# Altium PCB master.PcbDoc
Units mm, origin at the board's own origin, x right, y up, seen from the top; angles counter-clockwise.
Board outline 55 x 110 mm, 2 copper layers (Top Layer, Bottom Layer); 25 components, 39 nets, 291 pads, 34 vias.
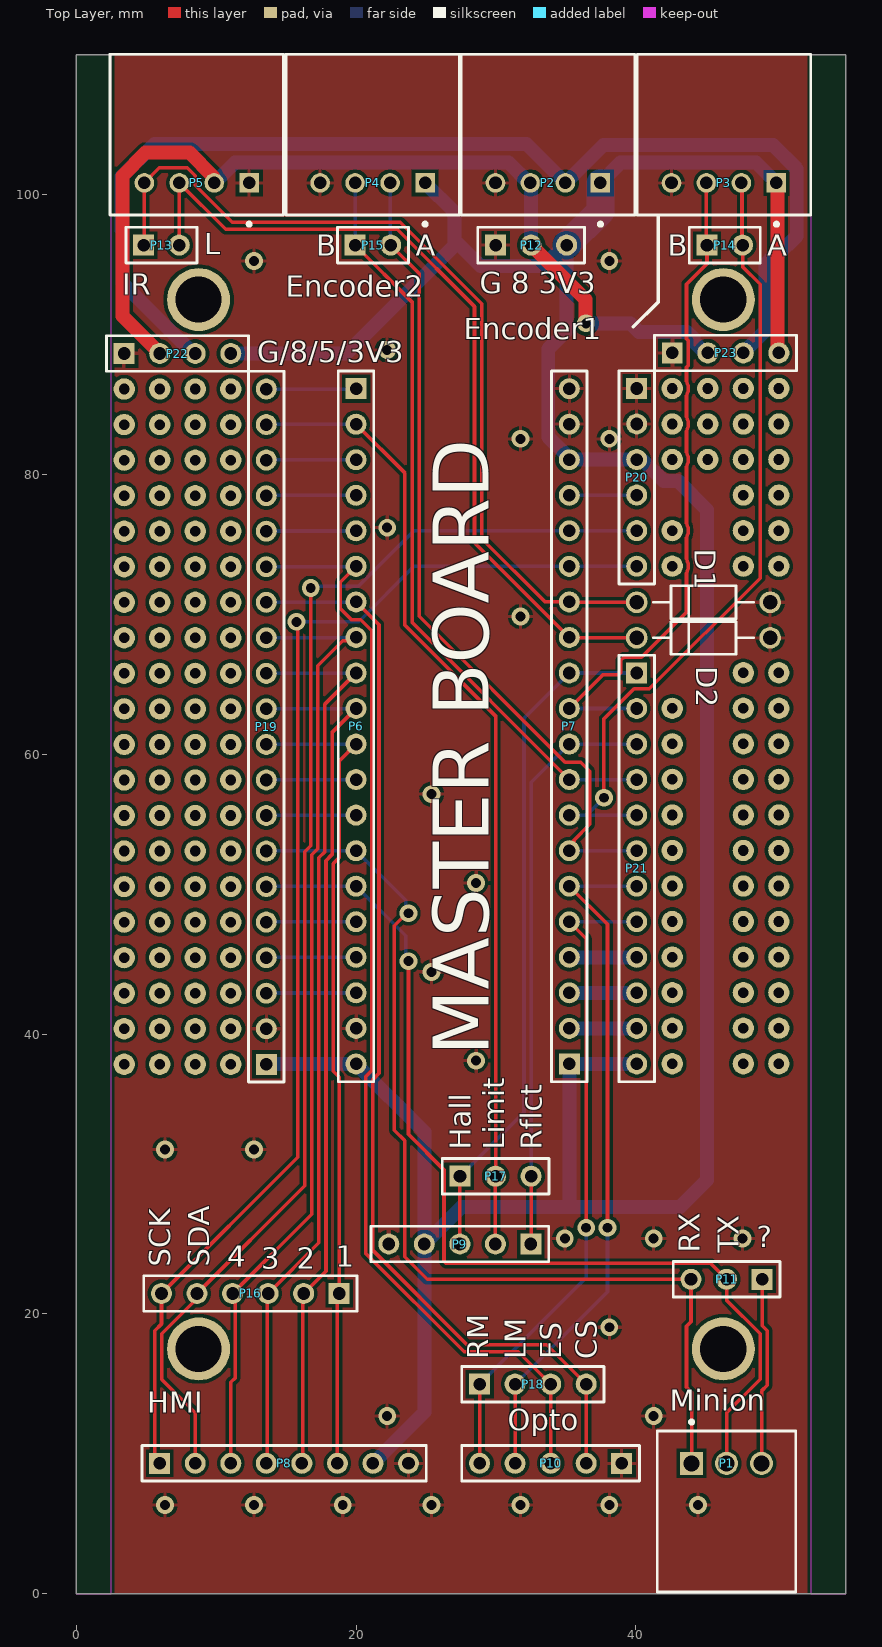
[diagram p0: Top Layer view]
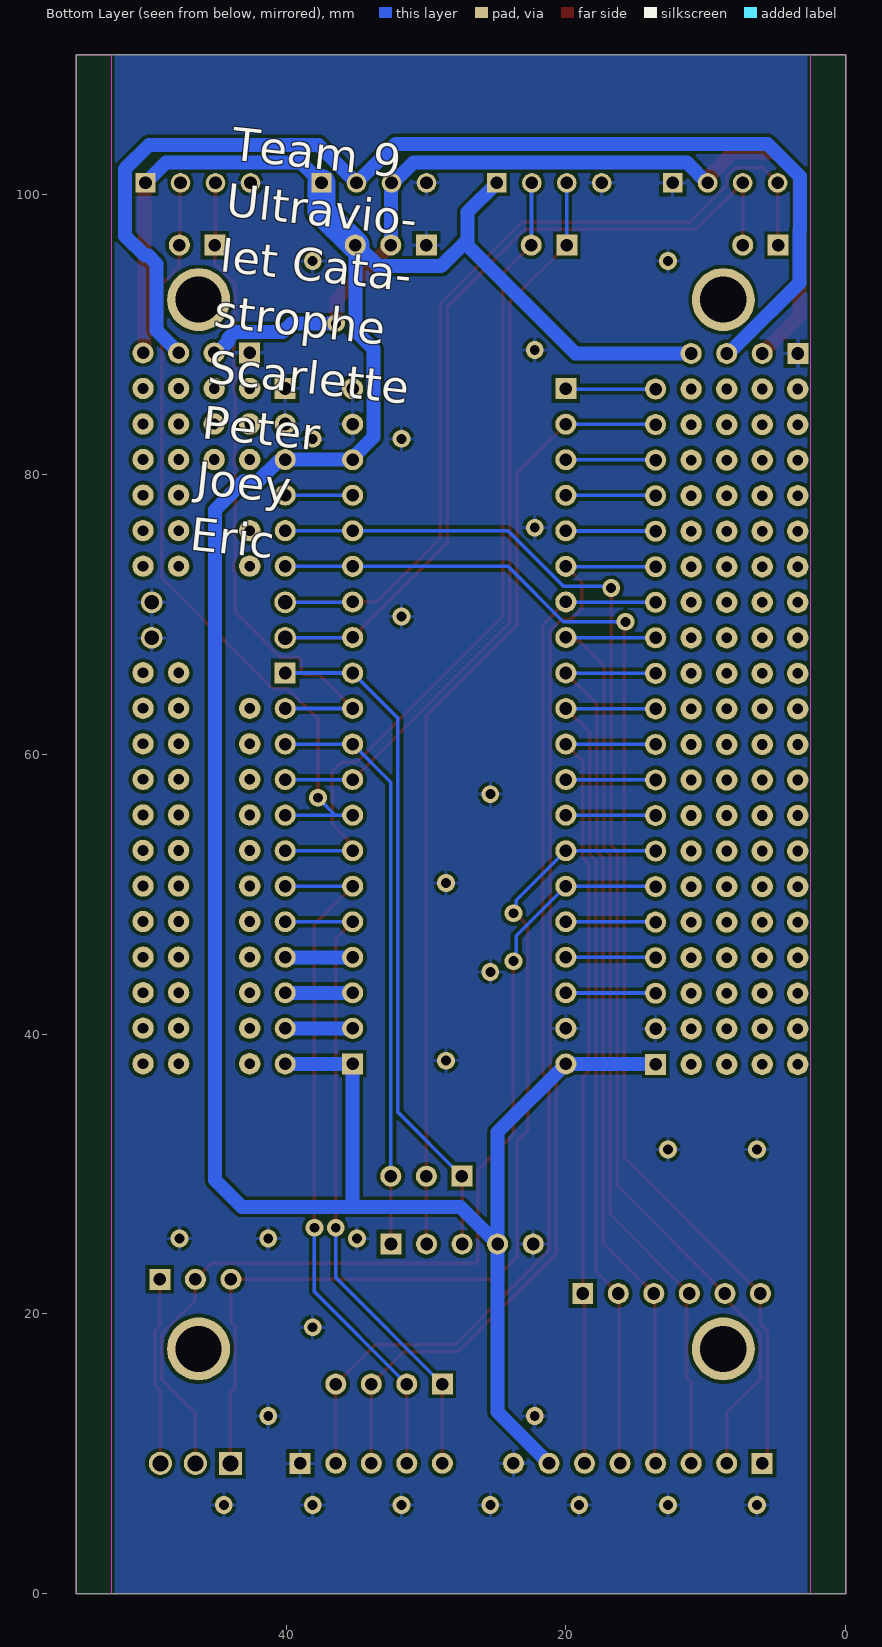
[diagram p1: Bottom Layer view, seen from below]

## Layer stack, top to bottom
Top Solder: solder mask 0.0102, Solder Resist, Dk 3.5
Top Layer: signal copper 0.0356
Dielectric 1: dielectric 0.32, FR-4, Dk 4.8
Bottom Layer: signal copper 0.0356
Bottom Solder: solder mask 0.0102, Solder Resist, Dk 3.5

## Board outline
0,0 0,110 55,110 55,0

## Design rules (kind name [scope] priority, off if disabled: settings)
Clearance [All] p1: gap=0.254 ignorepadtopadclearanceinfootprint=FALSE except(0: Arc-Hole Track-Hole SMDPad-Hole THPad-Hole Via-Hole Fill-Hole Poly-Hole Region-Hole Text-Hole)
PolygonConnect [All] p1: connectstyle=Relief reliefconductorwidth=0.254 reliefentries=4 polygonreliefangle="90 Angle" airgapwidth=0.254
RoutingVias [All] p1: holewidth=0.711 width=1.27 viastyle="Through Hole" minholewidth=0.711 minwidth=1.27 maxholewidth=0.711 maxwidth=1.27
SolderMaskExpansion [All] p1: expansion=0.102 istentingtop=FALSE
Width [All] p1: maxlimit=1 minlimit=0.254 preferedwidth=0.254 minimp=50.000000 maximp=50.000000 favimp=50.000000
30 further rules are at their usual default settings.

## Components (designator, comment, footprint, x,y, rotation, side; value= is the part's Value field where it differs from the comment)
D1 "1N5913BRLG" ONSC-AXIAL_LEAD-2-59-10_P 44.831,70.866 r0 top
D2 "1N5913BRLG" ONSC-AXIAL_LEAD-2-59-10_P 44.831,68.326 r0 top
P1 "S3B-XH-A(LF)(SN)" JST-S3B-XH-A(LF)(SN)_V 46.482,9.325 r0 top
P2 "S4B-XH-A(LF)(SN)" JST-S4B-XH-A(LF)(SN)_V 33.715,100.838 r180 top
P3 "S4B-XH-A(LF)(SN)" JST-S4B-XH-A(LF)(SN)_V 46.295,100.838 r180 top
P4 "S4B-XH-A(LF)(SN)" JST-S4B-XH-A(LF)(SN)_V 21.189,100.838 r180 top
P5 "S4B-XH-A(LF)(SN)" JST-S4B-XH-A(LF)(SN)_V 8.616,100.838 r180 top
P6 "Header 20" HDR1X20 20.002,86.133 r270 top
P7 "Header 20" HDR1X20 35.242,37.873 r90 top
P8 "Header 8" HDR1X8 5.969,9.325 r0 top
P9 "Header 5" HDR1X5 32.5,25 r180 top
P10 "Header 5" HDR1X5 38.989,9.325 r180 top
P11 "Header 3" HDR1X3 49.022,22.479 r180 top
P12 "Header 3" HDR1X3 29.972,96.393 r0 top
P13 "Header 2" HDR1X2 4.826,96.393 r0 top
P14 "Header 2" HDR1X2 45.085,96.393 r0 top
P15 "Header 2" HDR1X2 19.939,96.393 r0 top
P16 "Header 6" HDR1X6 18.796,21.463 r180 top
P17 "Header 3" HDR1X3 27.432,29.845 r0 top
P18 "Header 4" HDR1X4 28.829,14.986 r0 top
P19 "Header 20" HDR1X20 13.589,37.846 r90 top
P20 "Header 6" HDR1X6 40.061,86.147 r270 top
P21 "Header 12" HDR1X12 40.061,65.813 r270 top
P22 "Header 4" HDR1X4 3.429,88.646 r0 top
P23 "Header 4" HDR1X4 42.601,88.687 r0 top

## Footprints (in the part's own frame and the unit in brackets; to place one, negate y for a bottom-side part, rotate by r counter-clockwise, add the part's x,y. Pads: shape width x height; smd on the part's side, far side on the other; paste and mask are expansions set on the pad)
HDR1X2 [mm] "Connector; Header; 2 Position"
  rect 1.5x1.5 hole 0.9: 1(0,0)
  round 1.5 hole 0.9: 2(2.54,0)
  silkscreen extent -1.27,-1.27 3.81,1.27
HDR1X3 [mm] "Connector; Header; 3 Position"
  rect 1.5x1.5 hole 0.9: 1(0,0)
  round 1.5 hole 0.9: 2(2.54,0) 3(5.08,0)
  silkscreen extent -1.27,-1.27 6.35,1.27
HDR1X4 [mm] "Connector; Header; 4 Position"
  rect 1.5x1.5 hole 0.9: 1(0,0)
  round 1.5 hole 0.9: 2(2.54,0) 3(5.08,0) 4(7.62,0)
  silkscreen extent -1.27,-1.27 8.89,1.27
HDR1X5 [mm] "Connector; Header; 5 Position"
  rect 1.5x1.5 hole 0.9: 1(0,0)
  round 1.5 hole 0.9: 2(2.54,0) 3(5.08,0) 4(7.62,0) 5(10.16,0)
  silkscreen extent -1.27,-1.27 11.43,1.27
HDR1X6 [mm] "Connector; Header; 6 Position"
  rect 1.5x1.5 hole 0.9: 1(0,0)
  round 1.5 hole 0.9: 2(2.54,0) 3(5.08,0) 4(7.62,0) 5(10.16,0) 6(12.7,0)
  silkscreen extent -1.27,-1.27 13.97,1.27
HDR1X8 [mm] "Connector; Header; 8 Position"
  rect 1.5x1.5 hole 0.9: 1(0,0)
  round 1.5 hole 0.9: 2(2.54,0) 3(5.08,0) 4(7.62,0) 5(10.16,0) 6(12.7,0) 7(15.24,0) 8(17.78,0)
  silkscreen extent -1.27,-1.27 19.05,1.27
HDR1X12 [mm] "Connector; Header; 12 Position"
  rect 1.5x1.5 hole 0.9: 1(0,0)
  round 1.5 hole 0.9: 2(2.54,0) 3(5.08,0) 4(7.62,0) 5(10.16,0) 6(12.7,0) 7(15.24,0) 8(17.78,0) 9(20.32,0) 10(22.86,0) 11(25.4,0) 12(27.94,0)
  silkscreen extent -1.27,-1.27 29.21,1.27
HDR1X20 [mm] "Connector; Header; 20 Position"
  rect 1.5x1.5 hole 0.9: 1(0,0)
  round 1.5 hole 0.9: 2(2.54,0) 3(5.08,0) 4(7.62,0) 5(10.16,0) 6(12.7,0) 7(15.24,0) 8(17.78,0) 9(20.32,0) 10(22.86,0) 11(25.4,0) 12(27.94,0) 13(30.48,0) 14(33.02,0) 15(35.56,0) 16(38.1,0) 17(40.64,0) 18(43.18,0) 19(45.72,0) 20(48.26,0)
  silkscreen extent -1.27,-1.27 49.53,1.27
JST-S3B-XH-A(LF)(SN)_V [mm] "Header, 3-Leads, Body 9.9x11.5mm, Pitch 2.5mm"
  rect 1.65x1.65 hole 1.15: 1(-2.5,0)
  round 1.65 hole 1.15: 2(0,0) 3(2.5,0)
  silkscreen extent -4.95,-9.2 4.95,3.08, body extent -4.95,-9.2 4.95,2.3, height 6.15
JST-S4B-XH-A(LF)(SN)_V [mm] "Header, 4-Leads, Body 12.4x11.5mm, Pitch 2.5mm"
  rect 1.4x1.4 hole 0.9: 1(-3.75,0)
  round 1.4 hole 0.9: 2(-1.25,0) 3(1.25,0) 4(3.75,0)
  silkscreen extent -6.2,-9.2 6.2,3.08, body extent -6.2,-9.2 6.2,2.3, height 6.15
ONSC-AXIAL_LEAD-2-59-10_P [mm] "AXIAL, 2-Leads, Diameter 2.35mm"
  round 1.55 hole 1.05: 1(-4.77,0) 2(4.77,0)
  silkscreen extent -3.59,-1.17 3.59,1.17

## Part data
D1 D2: library part CMP-1060-00006-1, "3 W Zener Voltage Regulator, 2-Pin Axial_Lead, Pb-Free, Tape and Reel", Manufacturer="On Semiconductor", ComponentLink1Description="Manufacturer URL", ComponentLink1URL=http://www.onsemi.com/, ComponentLink2Description=Datasheet, ComponentLink2URL=http://www.onsemi.cn/pub_link/Collateral/1N5913B-D.PDF, ComponentLink3Description="Package Specification", ComponentLink3URL=http://www.onsemi.cn/pub_link/Collateral/59-10.PDF, DatasheetVersion="Rev. 5", Mounting Technology="Through Hole", PackageDescription="2-Pin, Axial Lead, Diameter 2.35 mm", PackageReference=AXIAL_LEAD-2-59-10, PackageVersion="Rev. U, 02/2005", Packing="Tape and Reel", PartNumber=1N5913BRLG, RoHS=Pb-Free, VZ Typ (V)=3.3
P1: library part CMP-1755-00006-1, "Male Header, Pitch 2.5 mm, 1 x 3 Position, Height 6.1 mm, Tail Length 3.4 mm, -25 to 85 degC, RoHS, Bulk", Case\Package=DIP, Frequency="1.8 MHz", Max Operating Temperature="70 degC", Max Ouput Current="-10 mA", Max Power Dissipation="1 W", Max Supply Voltage="15 V", Min Operating Temperature="0 degC", Min Supply Voltage="1 V", Nominal Supply Current="170 uA", Package Quantity=50, Channels=1, ComponentLink1Description="Manufacturer URL", ComponentLink1URL=http://www.jst.com/home2.html, ComponentLink2Description=Datasheet, ComponentLink2URL=http://www.jst-mfg.com/product/pdf/eng/eXH.pdf, DatasheetVersion=May-16, Height="4.57 mm", Length="9.81 mm", Mount="Through Hole", PackageDescription="Male Header, Pitch 2.5 mm, 1 x 3 Position, Height 6.1 mm, Tail Length 3.4 mm", PackageReference=S3B-XH-A(LF)(SN), Packaging=Rail/Tube, Pins=8, Radiation Hardening=No, REACH SVHC="No SVHC", RoHSCompliant=true, Weight="0.015535 oz", Width="6.35 mm"
P2 P3 P4 P5: library part CMP-1755-00007-1, "Male Header, Pitch 2.5 mm, 1 x 4 Position, Height 6.1 mm, Tail Length 3.4 mm, -25 to 85 degC, RoHS, Bulk", ComponentLink1Description="Manufacturer URL", ComponentLink1URL=http://www.jst.com/home2.html, ComponentLink2Description=Datasheet, ComponentLink2URL=http://www.jst-mfg.com/product/pdf/eng/eXH.pdf, DatasheetVersion=May-16, PackageDescription="Male Header, Pitch 2.5 mm, 1 x 4 Position, Height 6.1 mm, Tail Length 3.4 mm", PackageReference=S4B-XH-A(LF)(SN)
P6 P7 P19: "Header, 20-Pin", LatestRevisionDate=17-Jul-2002, LatestRevisionNote="Re-released for DXP Platform.", Publisher="Altium Limited"
P8: "Header, 8-Pin", LatestRevisionDate=17-Jul-2002, LatestRevisionNote="Re-released for DXP Platform.", Publisher="Altium Limited"
P9 P10: "Header, 5-Pin", LatestRevisionDate=17-Jul-2002, LatestRevisionNote="Re-released for DXP Platform.", Publisher="Altium Limited"
P11 P12 P17: "Header, 3-Pin", LatestRevisionDate=17-Jul-2002, LatestRevisionNote="Re-released for DXP Platform.", Publisher="Altium Limited"
P13 P14 P15: "Header, 2-Pin", LatestRevisionDate=17-Jul-2002, LatestRevisionNote="Re-released for DXP Platform.", Publisher="Altium Limited"
P16 P20: "Header, 6-Pin", LatestRevisionDate=17-Jul-2002, LatestRevisionNote="Re-released for DXP Platform.", Publisher="Altium Limited"
P18 P22 P23: "Header, 4-Pin", LatestRevisionDate=17-Jul-2002, LatestRevisionNote="Re-released for DXP Platform.", Publisher="Altium Limited"
P21: "Header, 12-Pin", LatestRevisionDate=17-Jul-2002, LatestRevisionNote="Re-released for DXP Platform.", Publisher="Altium Limited"

## Free pads (board coordinates)
  round 4.5 hole 3.3: 12(8.75,17.5) 12(8.75,92.5) 13(46.25,17.5) 13(46.25,92.5)
  round 1.524 hole 0.762: 14(5.969,42.926) 14(5.969,50.546) 14(5.969,58.166) 14(5.969,65.786) 14(5.969,73.406) 14(5.969,81.026) 14(5.969,86.106) 14(8.509,42.926) 14(8.509,50.546) 14(8.509,58.166) 14(8.509,65.786) 14(8.509,73.406) 14(8.509,81.026) 14(8.509,86.106) 14(45.141,81.067) 14(45.141,86.147) 14(47.681,42.967) 14(47.681,50.587) 14(47.681,58.207) 14(47.681,65.827) 14(47.681,73.447) 14(47.681,81.067) 14(47.681,86.147) 15(5.969,40.386) 15(5.969,48.006) 15(5.969,55.626) 15(5.969,63.246) 15(5.969,70.866) 15(5.969,78.486) 15(5.969,83.566) 15(8.509,40.386) 15(8.509,48.006) 15(8.509,55.626) 15(8.509,63.246) 15(8.509,70.866) 15(8.509,78.486) 15(8.509,83.566) 15(45.141,83.607) 15(47.681,40.427) 15(47.681,48.047) 15(47.681,55.667) 15(47.681,63.287) 15(47.681,78.527) 15(47.681,83.607) 16(11.049,40.386) 16(11.049,48.006) 16(11.049,55.626) 16(11.049,63.246) 16(11.049,70.866) 16(11.049,78.486) 16(11.049,83.566) 16(50.221,40.427) 16(50.221,48.047) 16(50.221,55.667) 16(50.221,63.287) 16(50.221,78.527) 16(50.221,83.607) 17(11.049,42.926) 17(11.049,50.546) 17(11.049,58.166) 17(11.049,65.786) 17(11.049,73.406) 17(11.049,81.026) 17(11.049,86.106) 17(50.221,42.967) 17(50.221,50.587) 17(50.221,58.207) 17(50.221,65.827) 17(50.221,73.447) 17(50.221,81.067) 17(50.221,86.147) 18(3.429,42.926) 18(3.429,50.546) 18(3.429,58.166) 18(3.429,65.786) 18(3.429,73.406) 18(3.429,81.026) 18(3.429,86.106) 18(42.601,42.967) 18(42.601,50.587) 18(42.601,58.207) 18(42.601,73.447) 18(42.601,81.067) 18(42.601,86.147) 19(3.429,40.386) 19(3.429,48.006) 19(3.429,55.626) 19(3.429,63.246) 19(3.429,70.866) 19(3.429,78.486) 19(3.429,83.566) 19(42.601,40.427) 19(42.601,48.047) 19(42.601,55.667) 19(42.601,83.607) 20(3.429,37.846) 20(3.429,45.466) 20(3.429,53.086) 20(3.429,60.706) 20(3.429,68.326) 20(3.429,75.946) 20(42.601,37.887) 20(42.601,45.507) 20(42.601,53.127) 20(42.601,60.747) 20(42.601,63.285) 20(42.601,75.987) 21(11.049,37.846) 21(11.049,45.466) 21(11.049,53.086) 21(11.049,60.706) 21(11.049,68.326) 21(11.049,75.946) 21(50.221,37.887) 21(50.221,45.507) 21(50.221,53.127) 21(50.221,60.747) 21(50.221,75.987) 22(5.969,37.846) 22(5.969,45.466) 22(5.969,53.086) 22(5.969,60.706) 22(5.969,68.326) 22(5.969,75.946) 22(8.509,37.846) 22(8.509,45.466) 22(8.509,53.086) 22(8.509,60.706) 22(8.509,68.326) 22(8.509,75.946) 22(47.681,37.887) 22(47.681,45.507) 22(47.681,53.127) 22(47.681,60.747) 22(47.681,75.987)

## Via types
v1: diameter 1.27, hole 0.711, Top Layer to Bottom Layer, tented both sides, 33 vias
v2: diameter 1.27, hole 0.711, Top Layer to Bottom Layer, 1 vias

## Nets (pads, with @x,y where several pads share a name; then routed paths per layer and width w, separated by ;. In a path a pad name is that pad's centre, name@x,y a point inside that pad or via, vN(x,y) a via of type N, cw(c..) or ccw(c..) an arc to the next point about the centre after c; other vN are vias at no path point)
3V3: P2.1 P3.1 P4.1 P6.20 P7.1 P7.18 P8.7 P9.4 P12.3 P19.1 P20.3 P21.12 P22.4 P23.4 | length 216.4
  Top Layer w1: P3.1 50.133,100.75 50.133,88.775 P23.4
  Bottom Layer w1: P22.4 19.304,88.646 27.024,96.366 27.024,96.774 ; P19.1 13.603,37.86 19.989,37.86 P6.20 24.88,32.996 P9.4 ; P8.7 24.88,12.996 P9.4 ; P4.1 27.024,98.753 27.024,96.774 ; P2.1 38.919,102.292 48.591,102.292 P3.1 ; P20.3@39.662,81.053 P7.18 35.242,81.188 33.738,82.692 33.738,88.957 35.052,90.271 P12.3 34.917,96.393 33.413,94.889 28.91,94.889 27.024,96.774 ; P21.12 P7.1 35.242,27.766 35.348,27.661 ; P20.3 40.157,80.971 40.553,80.971 41.973,79.551 43.004,79.551 45.085,77.47 45.085,29.591 43.155,27.661 35.348,27.661 ; P9.4 27.541,27.661 35.348,27.661
  Bottom Layer w2: P12.3 37.465,98.806 P2.1
5V: P2.2 P22.3 P23.3 | length 82
  Bottom Layer w1: P22.3 8.374,88.646 7.524,89.496 7.506,89.496 3.322,93.68 3.322,97.42 3.254,97.488 3.254,101.282 5.604,103.632 32.171,103.632 P2.2 37.673,103.546 49.803,103.546 51.499,101.85 51.499,97.048 50.087,95.636 49.84,95.636 49.254,95.05 49.254,90.296 47.681,88.723 P23.3
8V: P2.3 P5.2 P12.2 P22.2 P23.2 | length 67.4
  Top Layer w1: P22.2 5.969,88.672 3.302,91.339 3.302,101.33 4.969,102.997 8.104,102.997 9.789,101.311 9.789,100.915 P5.2 ; P12.2 36.389,92.516 36.389,90.857 v1(36.441,90.805)
  Bottom Layer w1: P5.2 9.9,100.838 11.354,102.292 30.903,102.292 32.38,100.814 32.488,100.814 32.488,96.417 P12.2 ; v1(36.441,90.805) 39.624,90.805 40.238,90.191 43.663,90.191 44.105,89.749 44.105,89.523 44.691,88.937 44.756,88.937 45.006,88.687 P23.2
"Claw Reflect": P7.10 P9.1 P17.3 P21.3 | length 41.7
  Top Layer w0.254: P9.1 32.512,25.012 P17.3
  Bottom Layer w0.254: P17.3 32.512,58.003 P7.10 P21.3
"Claw Servo Opto": P6.7 P10.2 P18.4 P19.14 | length 78.5
  Top Layer w0.254: P6.7 21.642,69.254 21.642,37.194 21.209,36.762 21.209,24.532 27.935,17.805 33.63,17.805 P18.4 P10.2
  Bottom Layer w0.254: P19.14 19.975,70.866 P6.7
Display_SCK: P7.15 P8.1 P16.6 P20.6 | length 90.5
  Top Layer w0.254: P8.1 5.611,9.683 5.611,18.8 6.096,19.285 P16.6 15.823,31.19 15.823,69.394 v1(15.748,69.469)
  Bottom Layer w0.254: v1(15.748,69.469) 15.763,69.484 20.193,69.484 24.142,73.433 P7.15 35.249,73.44 40.054,73.44 P20.6
Display_SDA: P7.16 P8.2 P16.5 P20.5 | length 93
  Top Layer w0.254: P8.2 8.509,12.931 6.119,15.321 6.119,18.59 8.398,20.868 8.398,21.225 P16.5 16.331,29.158 16.331,53.034 16.764,53.467 v1(16.764,71.882)
  Bottom Layer w0.254: v1(16.764,71.882) 16.906,72.024 20.193,72.024 24.142,75.973 P7.16 35.249,75.98 40.054,75.98 P20.5
"Elbow Servo Opto": P6.6 P10.3 P18.3 P19.15 | length 80.2
  Top Layer w0.254: P6.6 18.871,72.302 18.871,70.425 19.673,69.623 20.332,69.623 21.134,68.822 21.134,37.405 20.701,36.972 20.701,24.321 27.725,17.297 31.598,17.297 P18.3 P10.3
  Bottom Layer w0.254: P19.15 13.603,73.42 19.989,73.42 P6.6
Encoder1A: P3.2 P7.8 P14.2 P21.5 | length 56.3
  Top Layer w0.254: v2(37.719,56.896) 37.719,62.53 39.871,64.682 40.969,64.682 48.881,72.594 48.881,93.59 47.625,94.846 P14.2 47.585,96.433 47.585,100.798 P3.2
  Bottom Layer w0.254: P7.8 36.476,55.653 ; v2(37.719,56.896) 36.476,55.653 ; P21.5 36.476,55.653
Encoder1B: P3.3 P7.11 P14.1 P21.2 | length 48.2
  Top Layer w0.254: P7.11 37.649,65.679 38.781,65.679 38.856,65.754 38.93,65.828 38.93,66.721 39.153,66.944 40.401,66.944 43.619,70.162 43.619,72.927 ccw(c42.601,73.447) 43.619,73.967 43.619,75.467 ccw(c42.601,75.987) 43.619,76.507 43.619,80.547 ccw(c42.601,81.067) 43.619,81.587 43.619,83.029 43.619,83.087 ccw(c42.601,83.607) 43.619,84.127 43.619,84.185 43.619,85.627 ccw(c42.601,86.147) 43.619,86.667 43.619,87.666 43.732,87.779 43.732,89.595 43.619,89.708 43.619,93.59 45.085,95.056 P14.1 45.045,96.433 P3.3
  Bottom Layer w0.254: P7.11 P21.2
Encoder2A: P4.2 P7.7 P15.2 P21.6 | length 59.7
  Top Layer w0.254: P15.2 24.511,94.361 24.511,69.865 34.94,59.436 36.068,59.436 36.703,58.801 36.703,54.991 35.579,53.867 35.579,53.787 35.242,53.45 P7.7
  Bottom Layer w0.254: P4.2 22.459,100.818 22.459,96.413 P15.2 ; P7.7 P21.6
Encoder2B: P4.3 P7.9 P15.1 P21.4 | length 53.8
  Top Layer w0.254: P15.1 24.003,92.329 24.003,69.433 P7.9
  Bottom Layer w0.254: P15.1 P4.3 ; P7.9 P21.4
GND: D1.2 D2.2 P2.4 P3.4 P4.4 P5.1 P6.19 P7.19 P7.20 P8.8 P9.5 P10.1 P12.1 P19.2 P20.1 P20.2 P22.1 P23.1
  other v1: 6.35,6.35 12.7,6.35 19.05,6.35 25.4,6.35 31.75,6.35 38.1,6.35 44.45,6.35 22.225,12.7 41.275,12.7 38.1,19.05 34.925,25.4 41.275,25.4 47.625,25.4 6.35,31.75 12.7,31.75 28.575,38.1 25.4,44.45 28.575,50.8 25.4,57.15 31.75,69.85 22.225,76.2 31.75,82.55 38.1,82.55 22.225,88.9 12.7,95.25 38.1,95.25
"Hall Effect": P7.12 P9.3 P17.1 P21.1 | length 48.9
  Top Layer w0.254: P9.3 27.42,29.833 P17.1
  Bottom Layer w0.254: P17.1 32.004,34.417 32.004,62.575 P7.12 P21.1
HMI1: P6.8 P8.3 P16.4 P19.13 | length 69.7
  Top Layer w0.254: P8.3 11.049,15.109 11.381,15.441 11.381,21.258 P16.4 16.839,27.126 16.839,52.824 17.272,53.256 17.272,66.334 19.053,68.115 19.764,68.115 P6.8
  Bottom Layer w0.254: P19.13 13.603,68.34 19.989,68.34 P6.8
HMI2: P6.9 P8.4 P16.3 P19.12 | length 65.6
  Top Layer w0.254: P8.4 13.652,9.389 13.652,21.399 P16.3 17.347,25.094 17.347,52.613 17.78,53.046 17.78,63.591 P6.9
  Bottom Layer w0.254: P19.12 13.603,65.8 19.989,65.8 P6.9
HMI3: P6.10 P8.5 P16.2 P19.11 | length 62
  Top Layer w0.254: P8.5 16.192,9.389 16.192,21.399 P16.2 17.855,23.062 17.855,52.403 18.288,52.835 18.288,61.559 P6.10
  Bottom Layer w0.254: P19.11 13.603,63.26 19.989,63.26 P6.10
HMI4: P6.11 P8.6 P16.1 P19.10 | length 58.7
  Top Layer w0.254: P8.6 18.669,21.336 P16.1 18.796,36.923 18.363,37.356 18.363,52.193 18.796,52.625 18.796,59.527 P6.11
  Bottom Layer w0.254: P19.10 13.603,60.72 19.989,60.72 P6.11
"Left IR Strength": D2.1 P5.3 P7.13 P13.2 | length 65.3
  Top Layer w0.254: P13.2 P5.3 10.68,97.524 22.947,97.524 28.468,92.004 28.468,75.128 P7.13 35.256,68.34 40.047,68.34 D2.1
  Bottom Layer w0.254: P7.13 35.256,68.34 40.047,68.34 D2.1
"Left Motor Opto": P7.6 P10.4 P18.2 P21.7 | length 49.9
  Top Layer w0.254: P10.4 P18.2 ; P7.6 37.973,47.843 v1(37.973,26.162)
  Bottom Layer w0.254: P18.2 37.973,21.59 v1(37.973,26.162) ; P7.6 P21.7
"Limit Switch": P6.2 P9.2 P17.2 P19.19 | length 69.2
  Top Layer w0.254: P6.2 23.495,80.101 23.495,69.215 29.972,62.738 P17.2 29.966,29.839 29.966,25.006 P9.2
  Bottom Layer w0.254: P19.19 13.603,83.58 19.989,83.58 P6.2
NetP1_3: P1.3 P11.1 | length 13.5
  Top Layer w0.254: P1.3 48.982,14.49 49.389,14.897 49.389,18.8 49.022,19.167 P11.1
NetP6_1: P6.1 P19.20 | length 6.4
  Bottom Layer w0.254: P19.20 19.975,86.106 P6.1
NetP6_3: P6.3 P19.18 | length 6.4
  Bottom Layer w0.254: P19.18 13.603,81.04 19.989,81.04 P6.3
NetP6_4: P6.4 P19.17 | length 6.4
  Bottom Layer w0.254: P19.17 13.603,78.5 19.989,78.5 P6.4
NetP6_5: P6.5 P19.16 | length 6.4
  Bottom Layer w0.254: P19.16 13.603,75.96 19.989,75.96 P6.5
NetP6_12: P6.12 P19.9 | length 6.4
  Bottom Layer w0.254: P19.9 13.603,58.18 19.989,58.18 P6.12
NetP6_13: P6.13 P19.8 | length 6.4
  Bottom Layer w0.254: P19.8 13.603,55.64 19.989,55.64 P6.13
NetP6_16: P6.16 P19.5 | length 6.4
  Bottom Layer w0.254: P19.5 13.603,48.02 19.989,48.02 P6.16
NetP6_17: P6.17 P19.4 | length 6.4
  Bottom Layer w0.254: P19.4 13.603,45.48 19.989,45.48 P6.17
NetP6_18: P6.18 P19.3 | length 6.4
  Bottom Layer w0.254: P19.3 13.603,42.94 19.989,42.94 P6.18
NetP7_2: P7.2 P21.11 | length 4.8
  Bottom Layer w1: P7.2 P21.11
NetP7_3: P7.3 P21.10 | length 4.8
  Bottom Layer w1: P7.3 P21.10
NetP7_4: P7.4 P21.9 | length 4.8
  Bottom Layer w1: P7.4 P21.9
NetP7_17: P7.17 P20.4 | length 4.8
  Bottom Layer w0.254: P7.17 35.249,78.52 40.054,78.52 P20.4
"Right IR Strength": D1.1 P5.4 P7.14 P13.1 | length 68
  Top Layer w0.254: P13.1 4.866,96.433 P5.4 5.947,101.919 7.936,101.919 8.509,101.346 8.509,100.666 11.143,98.032 23.158,98.032 28.976,92.214 28.976,75.418 33.501,70.893 P7.14 35.256,70.88 40.047,70.88 D1.1
  Bottom Layer w0.254: P7.14 35.256,70.88 40.047,70.88 D1.1
"Right Motor Opto": P7.5 P10.5 P18.1 P21.8 | length 47.2
  Top Layer w0.254: P10.5 P18.1 ; P7.5 36.449,46.827 v1(36.449,26.162)
  Bottom Layer w0.254: P18.1 36.449,22.606 v1(36.449,26.162) ; P7.5 P21.8
Serial1_RX: P1.1 P6.14 P11.3 P19.7 | length 72.4
  Top Layer w0.254: v1(23.749,48.641) 23.622,48.641 22.733,47.752 22.733,33.131 23.471,32.393 23.471,24.091 25.083,22.479 P11.3 43.942,19.438 43.619,19.115 43.619,14.75 43.982,14.387 P1.1
  Bottom Layer w0.254: P19.7 13.603,53.1 19.989,53.1 P6.14 23.555,49.561 23.555,48.835 v1(23.749,48.641)
Serial1_TX: P1.2 P6.15 P11.2 P19.6 | length 71.7
  Top Layer w0.254: v1(23.749,45.212) 23.749,32.833 26.289,30.293 26.289,23.759 26.438,23.61 45.351,23.61 P11.2 46.482,20.989 48.881,18.59 48.881,15.346 46.482,12.947 P1.2
  Bottom Layer w0.254: P19.6 13.603,50.56 19.989,50.56 P6.15 23.555,47.021 23.555,45.406 v1(23.749,45.212)

## Polygon pours and split planes (outlines as drawn)
GND on Top Layer "GND_L01_P000" (solid, pour order 0): 0,110 55,110 55,0 0,0
GND on Bottom Layer "GND_L02_P001" (solid, pour order 1): 0,109.982 0,0 54.991,0 54.991,109.982

## Keep-outs
Keep-Out Layer:
  rectangle: 0,0 2.5,110
  rectangle: 52.5,0 55,110

## Silkscreen, mask and mechanical layers (free items; w line width, h text height)
Top Overlay:
  lines w0.254: 39.814,90.551 41.593,92.329 41.593,95.567 41.593,98.489
  text "L" at 9.144,95.758 h1.52
  text "B" at 17.145,95.631 h1.52
  text "A" at 24.257,95.631 h1.52
  text "B" at 42.291,95.631 h1.52
  text "A" at 49.403,95.631 h1.52
  text "G 8 3V3" at 28.829,92.964 h1.52
  text "IR" at 3.302,92.837 h1.52
  text "Encoder2" at 14.986,92.71 h1.52
  text "Encoder1" at 27.686,89.662 h1.52
  text "G/8/5/3V3" at 12.954,88.011 h1.52
  text "MASTER BOARD" at 29.472,38.473 h4 r90
  text "Hall" at 28.194,31.75 h1.52 r90
  text "Limit" at 30.607,31.75 h1.52 r90
  text "Rflct" at 33.274,31.75 h1.52 r90
  text "?" at 48.641,24.765 h1.52
  text "RX" at 44.577,24.384 h1.52 r90
  text "TX" at 47.371,24.384 h1.52 r90
  text "SCK" at 6.731,23.368 h1.52 r90
  text "SDA" at 9.525,23.368 h1.52 r90
  text "4" at 10.795,23.368 h1.52
  text "1" at 18.542,23.368 h1.52
  text "3" at 13.208,23.241 h1.52
  text "2" at 15.748,23.241 h1.52
  text "RM" at 29.464,16.764 h1.52 r90
  text "LM" at 32.131,16.764 h1.52 r90
  text "ES" at 34.671,16.764 h1.52 r90
  text "CS" at 37.211,16.764 h1.52 r90
  text "Minion" at 42.415,13.081 h1.52
  text "HMI" at 5.08,12.954 h1.52
  text "Opto" at 30.861,11.684 h1.52
Bottom Overlay:
  text "Team 9 / Ultravio- / let Cata- / strophe / Scarlette / Peter / Joey / Eric" at 47.012,73.849 h4 r6.09
Mechanical 1:
  the board outline again, w0.254

## Dimensions
9.998,92.663 to -0.002,110.163 on Mechanical 1
46.25,17.5 to 46.25,92.5 on Mechanical 1
8.75,92.5 to 0,110 on Mechanical 1
46.25,92.5 to 55,110 on Mechanical 1
46.25,92.5 to 55,110 on Mechanical 1
8.75,92.5 to 0,110 on Mechanical 1
8.75,92.5 to 46.25,92.5 on Mechanical 1
55,0 to 55,110 on Mechanical 1
0,0 to 55,0 on Mechanical 1
46.25,17.5 to 55,0 on Mechanical 1
8.75,17.5 to 0,0 on Mechanical 1
0,0 to 8.75,17.5 on Mechanical 1
46.25,17.5 to 55,0 on Mechanical 1
8.75,17.5 to 46.25,17.5 on Mechanical 1